# Altium PCB PCB1.PcbDoc
Units mil, origin at the board's own origin, x right, y up, seen from the top; angles counter-clockwise.
Board outline 633 x 1440 mil, 2 copper layers (Top Layer, Bottom Layer); 14 components, 12 nets, 54 pads, 17 vias.
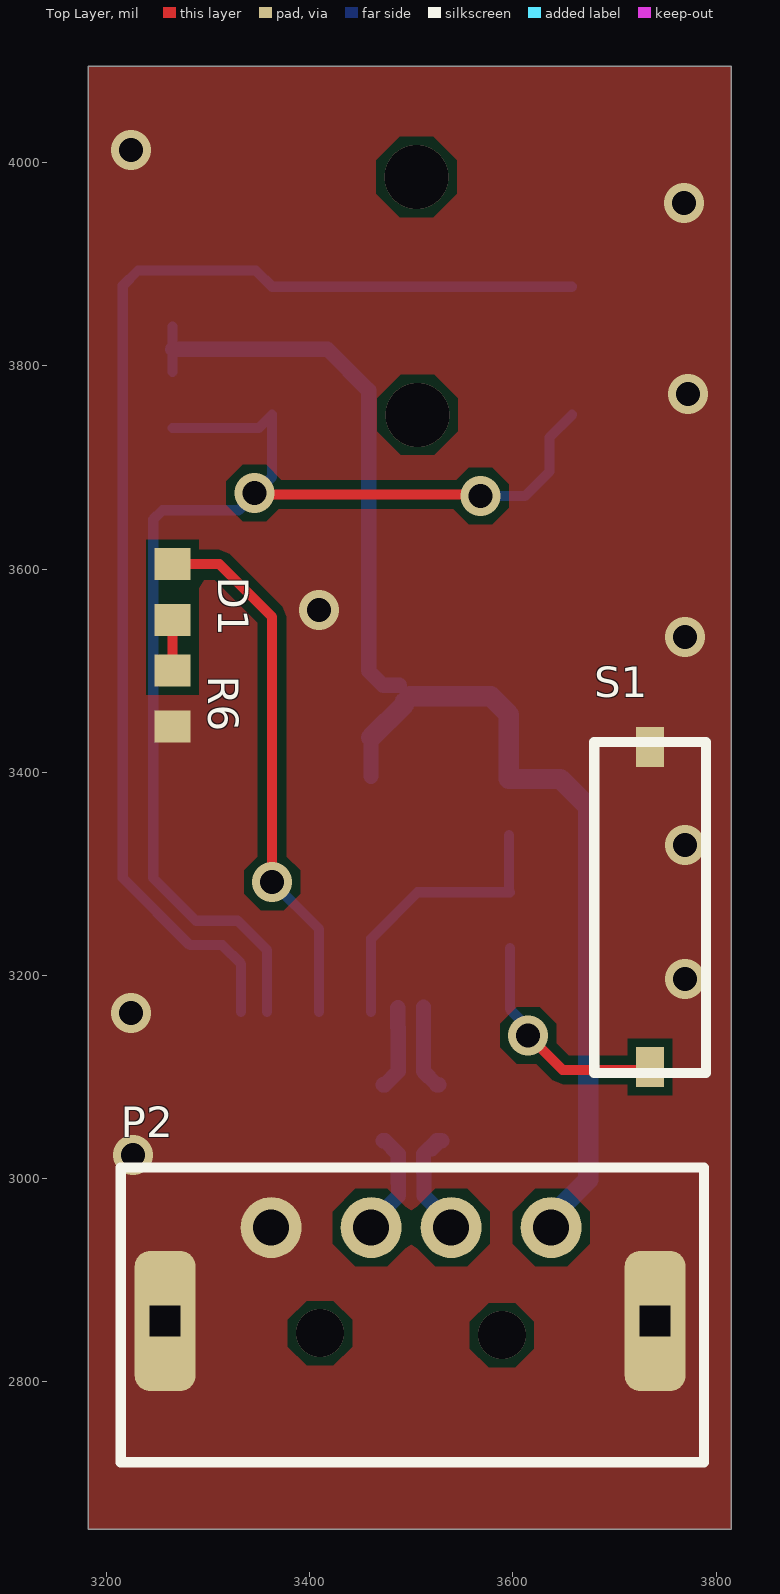
[diagram p0: Top Layer view]
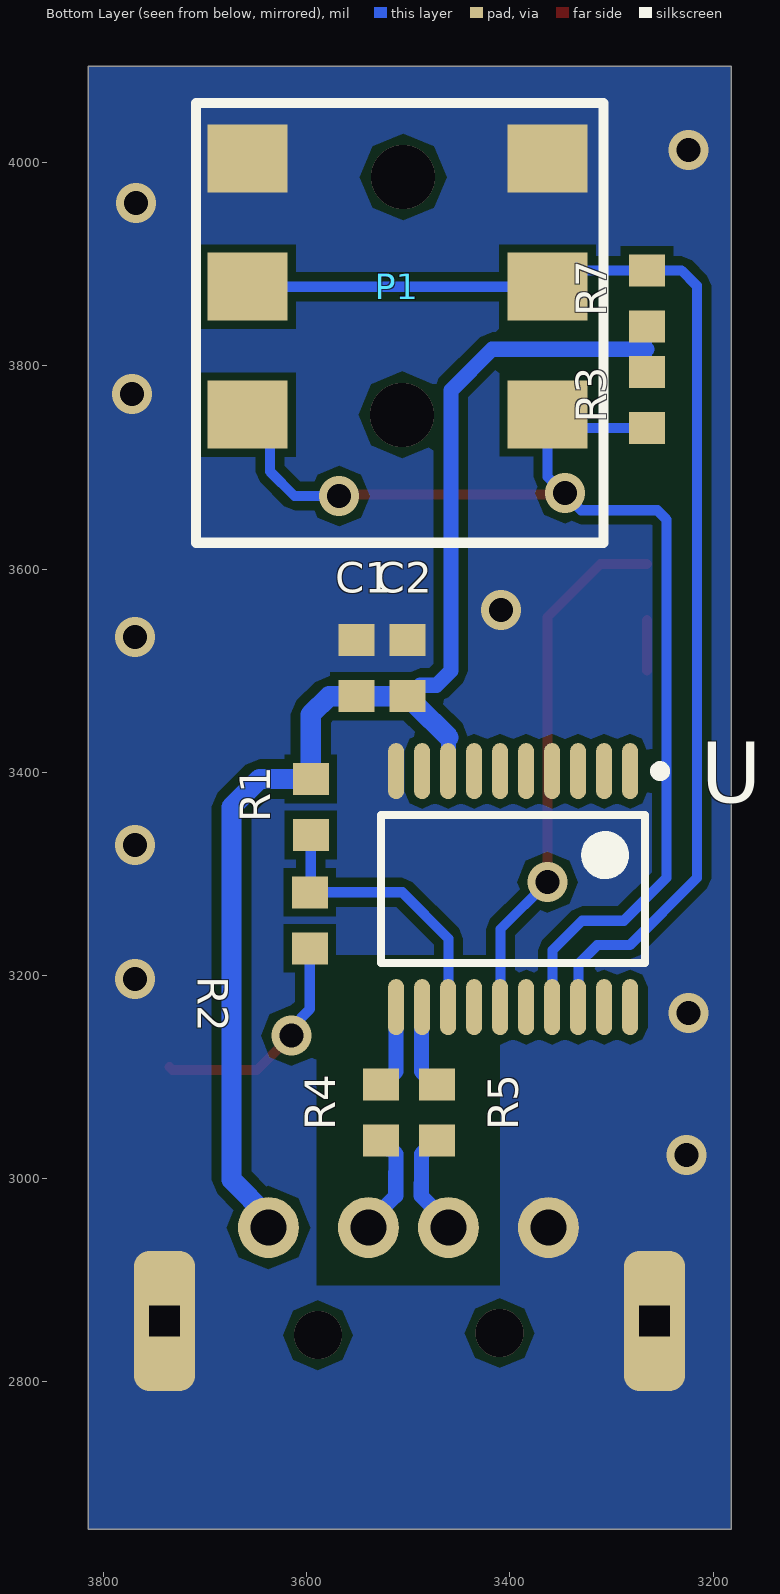
[diagram p1: Bottom Layer view, seen from below]
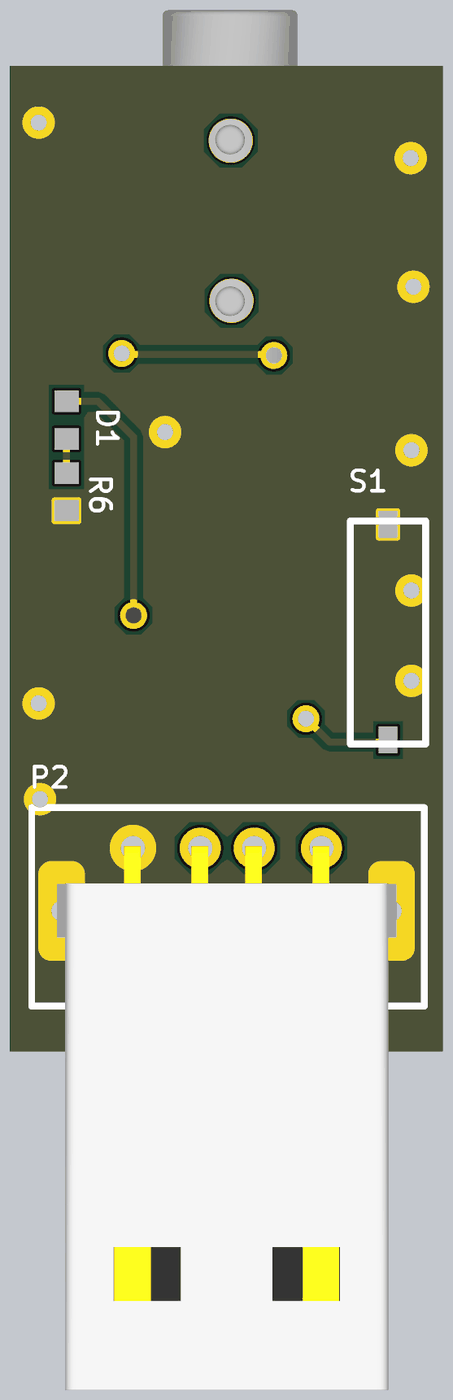
[diagram p2: 3D render of the assembled board from above, using the file's embedded part models]
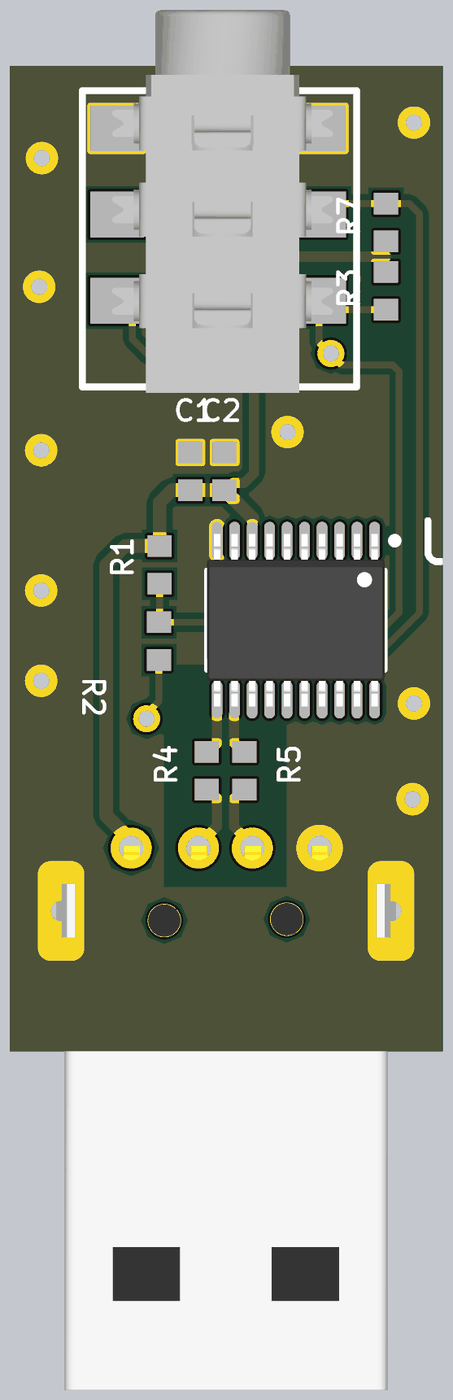
[diagram p3: 3D render of the assembled board from below, using the file's embedded part models]

## Layer stack, top to bottom
Top Solder: solder mask 0.4, Solder Resist, Dk 3.5
Top Layer: signal copper 1.4
Dielectric 1: dielectric 12.6, FR-4, Dk 4.8
Bottom Layer: signal copper 1.4
Bottom Solder: solder mask 0.4, Solder Resist, Dk 3.5

## Board outline
3182,2655 3182,4095 3815,4095 3815,2655

## Design rules (kind name [scope] priority, off if disabled: settings)
Clearance [All] p1: gap=8 ignorepadtopadclearanceinfootprint=FALSE
DiffPairsRouting [All] p1: maxlimit=10 minlimit=10 mostfreqgap=10 toplayer_minwidth=15 toplayer_maxwidth=15 toplayer_prefwidth=15 bottomlayer_minwidth=15 bottomlayer_maxwidth=15 bottomlayer_prefwidth=15 maxuncoupledlength=500
PlaneConnect [All] p1: planeconnectstyle=Direct reliefexpansion=20 reliefentries=4 reliefconductorwidth=10 reliefairgap=10
PolygonConnect [All] p1: connectstyle=Direct reliefconductorwidth=10 reliefentries=4 polygonreliefangle="90 Angle" airgapwidth=10
RoutingVias [All] p1: holewidth=28 width=50 viastyle="Through Hole" minholewidth=28 minwidth=50 maxholewidth=28 maxwidth=50
SolderMaskExpansion [All] p1: expansion=4 istentingtop=FALSE
Width [All] p1: maxlimit=25 minlimit=5 preferedwidth=10
28 further rules are at their usual default settings.

## Classes and differential pairs
differential pair P3/D: +P3/D_P -P3/D_N
differential pair D: +D_P -D_N

## Components (designator, comment, footprint, x,y, rotation, side; value= is the part's Value field where it differs from the comment)
C1 "Cap" 1608(0603)_C 3551,3501 r270 bottom value=0.1uF
C2 "Cap Pol1" 1608(0603)_C 3501,3504.12 r90 bottom value=22uF
D1 "LED0" 1608(0603)_R 3265,3577.56 r270 top
P1 "Header 4" PJ-313D 3363,4003.98 r270 bottom
P2 "Header 4" USB-A-DIP 3362.05,2952 r0 top locked
R1 "Res1" 1608(0603)_R 3596,3366 r270 bottom value=10K
R2 "Res1" 1608(0603)_R 3597,3254.44 r90 bottom value=33
R3 "Res1" 1608(0603)_R 3265,3766.44 r270 bottom value=33K
R4 "Res1" 1608(0603)_R 3527,3065 r90 bottom value=33
R5 "Res1" 1608(0603)_R 3472,3065 r90 bottom value=33
R6 "Res1" 1608(0603)_R 3265,3472.56 r270 top value=1K
R7 "Res1" 1608(0603)_R 3265,3866.44 r90 bottom value=33K
S1 "SW-SPST" "SWITCH2 3*6*2.5" 3735,3110.04 r180 top
U "STC8H8K64U" TSOP65P640X120-20N 3396.84,3285.14 r270 bottom

## Footprints (in the part's own frame and the unit in brackets; to place one, negate y for a bottom-side part, rotate by r counter-clockwise, add the part's x,y. Pads: shape width x height; smd on the part's side, far side on the other; paste and mask are expansions set on the pad)
1608(0603)_C [mm]
  rect 0.8x0.9 smd: 1(-0.74,0) 2(0.66,0)
  body extent -0.89,-0.41 0.71,0.39, height 0.9
1608(0603)_R [mm]
  rect 0.8x0.9 smd: 1(-0.7,0) 2(0.7,0)
  body extent -0.83,-0.39 0.77,0.41, height 0.45
PJ-313D [mm]
  rect 1.7x2 smd: 2(0,-7.5) 2(0,0) 3(3.2,-7.5) 3(3.2,0) 4(6.4,-7.5) 4(6.4,0)
  silkscreen extent -1.4,-8.79 9.6,1.4, body extent -4.38,-7.68 9.82,0.52, height 5.5
"SWITCH2 3*6*2.5" [mm]
  rect 0.7x1 smd: 1(0,0) 2(0,-8)
  silkscreen extent -1.4,-8.13 1.4,0.15
TSOP65P640X120-20N [mm] "TSOP, 20-Leads, Body 6.50x4.40mm, Pitch 0.65mm, IPC Medium Density"
  oval 1.4x0.4 smd: 1(-2.95,2.925) 2(-2.95,2.275) 3(-2.95,1.625) 4(-2.95,0.975) 5(-2.95,0.325) 6(-2.95,-0.325) 7(-2.95,-0.975) 8(-2.95,-1.625) 9(-2.95,-2.275) 10(-2.95,-2.925) 11(2.95,-2.925) 12(2.95,-2.275) 13(2.95,-1.625) 14(2.95,-0.975) 15(2.95,-0.325) 16(2.95,0.325) 17(2.95,0.975) 18(2.95,1.625) 19(2.95,2.275) 20(2.95,2.925)
  silkscreen extent -3.07,-3.3 1.85,3.8, body extent -3.2,-3.3 3.2,3.3, height 1.2
USB-A-DIP [mil]
  round 60 hole 35.43: 1(0,0) 2(98.43,0) 3(177.17,0) 4(275.59,0)
  rrect50% 60x137.8 hole 30 square: 7(-104.33,-92) 7(377.95,-92)
  silkscreen extent -148,-231 426,59, body extent -111,-792 385,3, height 177

## Part data
C1: "Capacitor", LatestRevisionDate=17-Jul-2002, LatestRevisionNote="Re-released for DXP Platform.", PackageDescription="Radial Cap, Thru-Hole; 2 Leads; 0.3 in Pin Spacing", PackageReference=RAD-0.3, Published=8-Jun-2000, Publisher="Altium Limited"
C2: "Polarized Capacitor (Radial)", LatestRevisionDate=17-Jul-2002, LatestRevisionNote="Re-released for DXP Platform.", PackageDescription="Polarized Capacitor (Radial); 2 Leads", PackageReference=RB7.6-15, Published=8-Jun-2000, Publisher="Altium Limited"
D1: "Typical INFRARED GaAs LED", LatestRevisionDate=08-Jul-2005, LatestRevisionNote="Mech Layer 1 removed.", PackageDescription="LED; 2 Leads", PackageReference=LED-0, Published=8-Jun-2000, Publisher="Altium Limited"
P1 P2: "Header, 4-Pin", LatestRevisionDate=17-Jul-2002, LatestRevisionNote="Re-released for DXP Platform.", Publisher="Altium Limited"
R1 R2 R3 R4 R5 R6 R7: "Resistor", LatestRevisionDate=17-Jul-2002, LatestRevisionNote="Re-released for DXP Platform.", PackageDescription="Axial Device, Thru-Hole; 2 Leads; 0.3 in Pin Spacing", PackageReference=AXIAL-0.3, Published=8-Jun-2000, Publisher="Altium Limited"
S1: "Single-Pole, Single-Throw Switch", LatestRevisionDate=17-Jul-2002, LatestRevisionNote="Re-released for DXP Platform.", PackageDescription="Switch; 2 Leads", PackageReference=SPST-2, Published=24-Mar-1999, Publisher="Altium Limited"

## Via types
v1: diameter 39.37, hole 23.62, Top Layer to Bottom Layer, 13 vias
v2: diameter 62.99, hole 62.99, Top Layer to Bottom Layer, 2 vias
v3: diameter 47.24, hole 47.24, Top Layer to Bottom Layer, 2 vias

## Nets (pads, with @x,y where several pads share a name; then routed paths per layer and width w, separated by ;. In a path a pad name is that pad's centre, name@x,y a point inside that pad or via, vN(x,y) a via of type N, cw(c..) or ccw(c..) an arc to the next point about the centre after c; other vN are vias at no path point)
D_N: P2.3 R4.1 | length 117.5
  Bottom Layer w15: R4.1@3520,3029.19 3528.25,3037.44 R4.1@3530,3037.44 ; R4.1 3525.03,3037.44 3512,3024.41 3512,3006.41 3512.34,3006.07 3512.34,2983.29 3539.21,2956.42 P2.3
D_P: P2.2 R5.1 | length 110.6
  Bottom Layer w15: P2.2@3467,2952 P2.2 3460.47,2956.42 3487.34,2983.29 3487.34,2995.71 3487,2996.06 3487,3024.41 3473.97,3037.44 R5.1
GND: C1.1 C2.2 P1.2 P2.1 P2.7 R6.2 S1.2 U.10
  other v1: 3226.12,3023.41 3224.12,3163.41 3769.12,3196.41 3769.12,3328.41 3769.12,3533.41 3409,3560 3772.12,3772.41 3768.12,3960.41 3224.12,4012.41
L: P1.3 R7.2 U.18 | length 1237.1
  Bottom Layer w10: U.18@3332.46,3164 3332.46,3211.54 3314,3230 3282,3230 3216,3296 3216,3879 3231,3894 R7.2 3347,3894 3363,3878 P1.3@3658.28,3878
NetD1_1: D1.1 U.15 | length 531.7
  Top Layer w10: D1.1 3310.88,3605.12 3363,3553 v1(3363,3292)
  Bottom Layer w10: v1@3359,3292 v1(3363,3292) 3409.23,3245.77 U.15@3409.23,3164
NetD1_2: D1.2 R6.1 | length 49.9
  Top Layer w10: R6.1 D1.2
NetR1_2: R1.2 R2.2 U.13 | length 284.7
  Bottom Layer w10: U.13@3460.41,3164 3460.41,3236.41 3506,3282 R2.2 3596,3283 R1.2
NetR2_1: R2.1 S1.1 | length 228.7
  Top Layer w10: v1(3615,3141) 3649,3107 3731.96,3107 S1.1
  Bottom Layer w10: R2.1 3597,3166.95 3615,3148.95 v1(3615,3141)
P3/D_N: R4.2 U.11 | length 83.8
  Bottom Layer w15: U.11 3512,3105.59 3525.03,3092.56 R4.2
P3/D_P: R5.2 U.12 | length 83.5
  Bottom Layer w15: R5.2 3473.97,3092.56 3487,3105.59 3487,3148.52 3486.55,3148.97 3486.55,3168.21 U.12@3486.75,3168.41
R: P1.4 R3.2 U.17 | length 1221
  Top Layer w10: v1(3345.62,3674.91) 3347.08,3673.45 3566.55,3673.45 v1(3568,3672)
  Bottom Layer w10: R3.2 3349.87,3738.88 3363,3752.02 3363,3691 3330,3658 3255,3658 3246,3649 3246,3296 3288,3254 3329,3254 3358.05,3224.95 U.17@3358.05,3164 ; v1(3568,3672) 3612,3672 3636,3696 3636,3729.74 P1.4@3658.28,3752.02
USB5V: C1.2 C2.1 P2.4 R1.1 R3.1 R7.1 U.8 | length 1366.4
  Bottom Layer w10: R3.1 3265,3816.44 R7.1 ; C2.1@3488.28,3485.75 3493.28,3480.75 C2.1@3493.28,3469.25
  Bottom Layer w15: 3265,3816.44 3417.56,3816.44 3458,3776 3458,3500 3472.25,3485.75 C2.1@3488.28,3485.75 ; U.8@3460.41,3396.28 3460.41,3434.41
  Bottom Layer w20: 3460.41,3434.41 3493.28,3467.28 3493.28,3469.25 3499.03,3475 C2.1 C1.2 3578,3475 3596,3457 R1.1 3646.44,3393.56 3674,3366 3674,2999.19 3637.64,2962.82 P2.4
pads on no net: U.1 U.2 U.3 U.4 U.5 U.6 U.7 U.9 U.14 U.16 U.19 U.20
copper on no net:
  other v2: 3506,3751.98 3505,3985.98
  other v3: 3589.05,2846 3410.05,2848

## Polygon pours and split planes (outlines as drawn)
GND on Top Layer "GND_L01_P001" (solid, remove dead copper, pour order 1): 3183,4095 3815,4095 3815,2655 3183,2655
GND on Bottom Layer "Bottom Layer-GND" (solid, remove dead copper, pour order 0): 3183,2655 3183,4095 3815,4095 3815,2655

## Other copper
Bottom Layer:
  pour cut-out: 3410,2895 3410,3220 3590,3220 3590,2895

## Silkscreen, mask and mechanical layers (free items; w line width, h text height)
Mechanical 1:
  lines w10: 3190,2655 3815,2655 ; 3190,2655 3190,4095 ; 3190,2655 3815,2655 ; 3190,2655 3190,4095 ; 3190,4095 3815,4095 ; 3190,4095 3815,4095 ; 3815,2655 3182,2655 3182,4095 3815,4095 ; 3815,2655 3815,4095 ; 3815,2655 3815,4095 ; 3815,2655 3815,4095 ; 3410,2895 3590,2895 3590,3220 3410,3220 3410,2895